# EAGLE board BLE v0.1a prater mod (EAGLE 6.5.0)
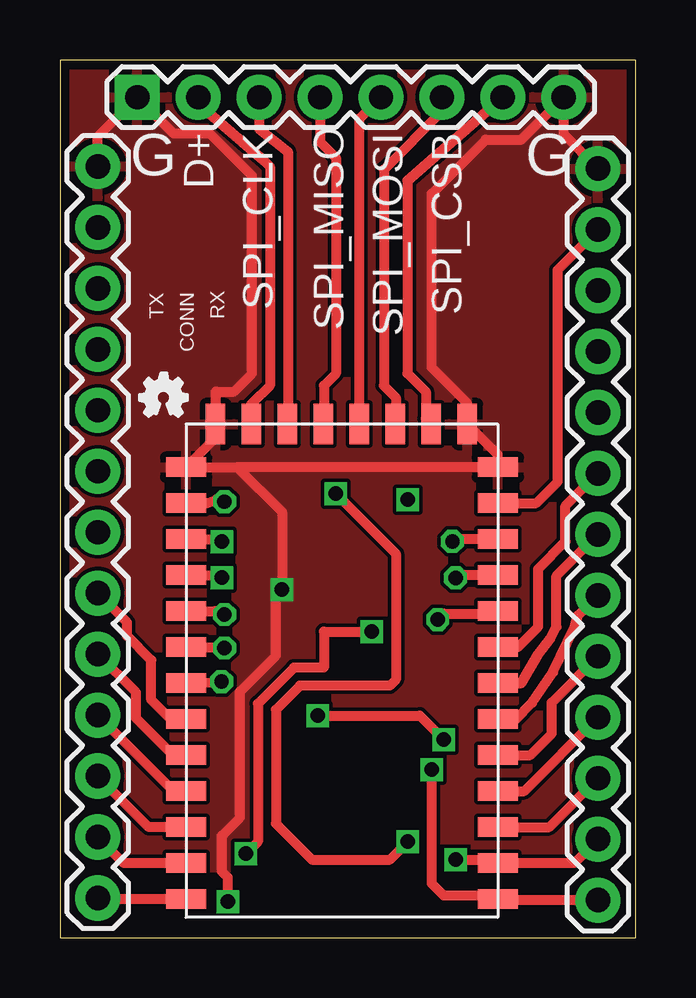
[diagram p0: board, top side]
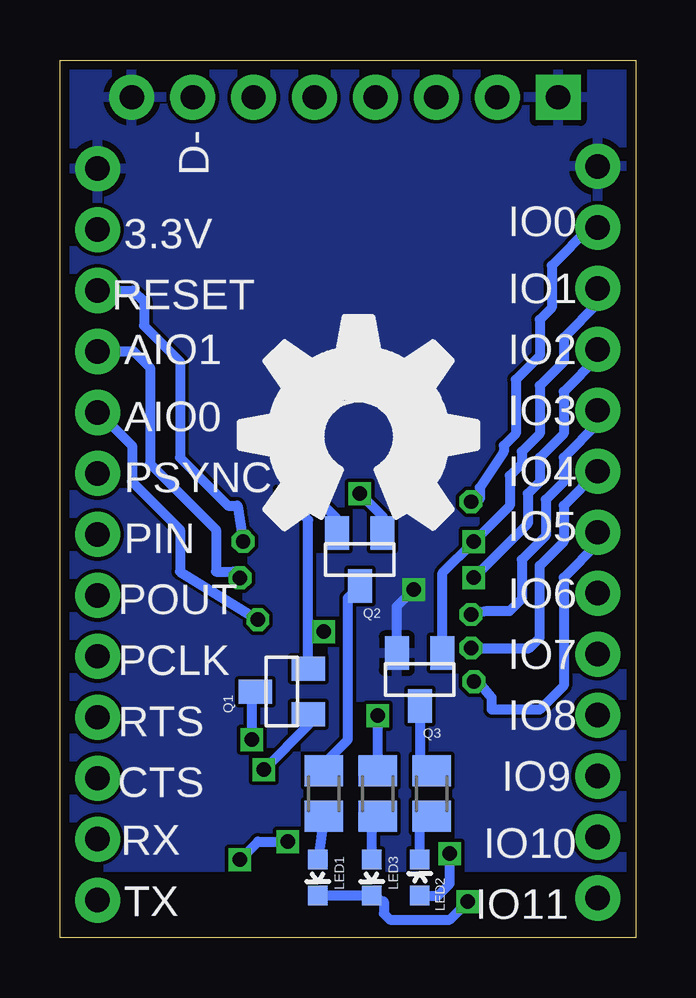
[diagram p1: board, bottom side, seen from below]

Size 24 x 36.57 mm. Coordinates in mm from the lower left corner, seen from the top.
Outline: 0,0 24,0 24,36.57 0,36.57 0,0
Copper layers (1*16): Top 0.0356mm / dielectric 1.5011mm / Bottom 0.0356mm
Design rules "LaenPCBOrder *": minimum track width 12mil, minimum drill 13mil, track to track 6mil, track to pad 6mil, pad to pad 6mil, via to via 6mil, smd to smd 6mil, copper to edge 15mil, drill to drill 6mil, minimum pad ring 7mil, minimum via ring 7mil, stop-mask expansion 4mil, vias tented up to drill 0mil, thermal gap 10mil

## Footprints (pad centres in the part's own frame; a part is rotated, then mirrored left to right if it is on the bottom)
1X13 = drill 1.016 pad 1.88: 1 0,0; 2 2.54,0; 3 5.08,0; 4 7.62,0; 5 10.16,0; 6 12.7,0; 7 15.24,0; 8 17.78,0; 9 20.32,0; 10 22.86,0; 11 25.4,0; 12 27.94,0; 13 30.48,0
1X08 = drill 1.016 pad 1.88 square: 1 0,0 | drill 1.016 pad 1.88: 2 2.54,0; 3 5.08,0; 4 7.62,0; 5 10.16,0; 6 12.7,0; 7 15.24,0; 8 17.78,0
LED-0603 = smd 0.8 x 0.8: A 0,-0.75; C 0,0.75
SOT23 = smd 1 x 1.4: 1 -0.95,-1.1; 2 0.95,-1.1; 3 0,1.1
M0805 = smd 1.3 x 1.6: 1 -0.95,0; 2 0.95,0
BLE-HM-10 = smd 1.676 x 0.813: 3.3V 0,3.29; AIO0 0,7.79; AIO1 0,6.29; GND1 0,1.79; GND4 13,1.79; PCM_CLK 0,13.79; PCM_IN 0,10.79; PCM_OUT 0,12.29; PCM_SYNC 0,9.29; PIO0 13,3.29; PIO1 13,4.79; PIO2 13,6.29; PIO3 13,7.79; PIO4 13,9.29; PIO5 13,10.79; PIO6 13,12.29; PIO7 13,13.79; PIO8 13,15.29; PIO9 13,16.79; PIO10 13,18.29; PIO11 13,19.79; RESET 0,4.79; UART_CTS 0,16.79; UART_RTS 0,15.29; UART_RX 0,18.29; UART_TX 0,19.79 | smd 0.813 x 1.676: GND2 1.27,0; GND3 11.77,0; SPI_CLK 8.77,0; SPI_CSB 4.27,0; SPI_MISO 7.27,0; SPI_MOSI 5.77,0; USB_D+ 10.27,0; USB_D- 2.77,0

## Placement (x,y rotation side)
JP1  M13  [1X13]  22.43,32.04 270 top
JP2  M13  [1X13]  1.58,1.65 90 top
JP3  [1X08]  3.22,35.02 0 top
LED1  [LED-0603]  13.25,2.5 180 bottom
LED2  [LED-0603]  9,2.5 0 bottom
LED3  [LED-0603]  11,2.5 180 bottom
Q1  MMBT3906  [SOT23]  14.75,10.25 90 bottom
Q2  MMBT3906  [SOT23]  11.5,15.75 180 bottom
Q3  MMBT2222A  [SOT23]  9,10.75 180 bottom
R7  220  [M0805]  8.5,6 270 bottom
R8  220  [M0805]  10.75,6 90 bottom
R9  220  [M0805]  13,6 90 bottom
U$1  BLE-HM-10  [BLE-HM-10]  18.26,21.4 180 top
U$2  [OSHW_FILLX350_NOTEXT]  16.51,17.02 0 bottom
U$3  [OSHW_FILLX70_NOTEXT]  3.32,21.73 0 top

## Library data of the parts
JP1-JP3 LED1-LED3 = SparkFun
Q1 Q2 = SparkFun-DiscreteSemi; PROD_ID: TRANS-08052
Q3 = SparkFun-DiscreteSemi; PROD_ID: TRANS-08049
R7-R9 = resistor
U$1 = Random parts
U$2 U$3 = ohw-logo

## Nets
3.3V: LED2.A Q1.2 Q2.2
GND: JP1.1 JP2.13 JP3.1 JP3.8 LED1.C LED3.C Q3.2 U$1.GND1 U$1.GND2 U$1.GND3 U$1.GND4
HVTX->LVRX: JP1.12 Q2.1 U$1.UART_RX
LVRX->HVTX: JP1.13 Q1.1 U$1.UART_TX
N$2: Q3.3 R7.1
N$3: JP1.3 U$1.RESET
N$4: JP1.4 U$1.AIO1
N$5: JP1.5 U$1.AIO0
N$6: JP1.6 U$1.PCM_SYNC
N$7: JP1.7 U$1.PCM_IN
N$8: JP1.8 U$1.PCM_OUT
N$9: JP1.9 U$1.PCM_CLK
N$10: JP1.10 U$1.UART_RTS
N$11: JP1.11 U$1.UART_CTS
N$14: JP2.1 U$1.PIO11
N$15: JP2.2 U$1.PIO10
N$16: JP2.3 U$1.PIO9
N$17: JP2.4 U$1.PIO8
N$18: JP2.5 U$1.PIO7
N$19: JP2.6 U$1.PIO6
N$20: JP2.7 U$1.PIO5
N$21: JP2.8 U$1.PIO4
N$22: JP2.9 U$1.PIO3
N$23: JP2.10 U$1.PIO2
N$25: JP2.11 Q3.1 U$1.PIO1
N$26: LED2.C R7.2
N$28: JP3.2 U$1.USB_D+
N$29: JP3.3 U$1.SPI_CLK
N$30: JP3.4 U$1.SPI_MISO
N$31: JP3.5 U$1.SPI_MOSI
N$32: JP3.6 U$1.SPI_CSB
N$33: JP3.7 U$1.USB_D-
N$34: Q2.3 R9.2
N$35: LED1.A R9.1
N$39: LED3.A R8.1
N$40: Q1.3 R8.2
N$41: JP1.2 U$1.3.3V
N$42: JP2.12 U$1.PIO0

## Tracks (layer width: path | path; a pad name or v marks a point on that pad's centre or on a via)
3.3V  (via drill 0.6)
  Top 0.406: 14.64,18.11 v14.5,18.25 | v13,12.75 11,12.75 11,11.25 9.75,11.25 8.25,9.75 8.25,4 v7.75,3.5
  Bottom 0.406: Q2.2 12.45,17.45 13.25,18.25 v14.5,18.25 13.65,17.4 13.65,12.75 | Q1.2 13.65,12.75 | v13,12.75 13.65,12.75 | LED2.A 8.25,1.75 7.75,2.25 v7.75,3.5
GND  (via drill 0.6)
  Top 0.406: JP2.13 1.58,33.37 JP3.1 4.74,33.5 6.25,33.5 8,31.75 8,23.5 7.25,22.75 6.5,22.75 U$1.GND3 6.49,20.84 U$1.GND4 7.39,19.61 | JP1.1 21,33.47 JP3.8 19.24,33.25 17.75,33.25 15.5,31 15.5,23.75 16.99,22.26 U$1.GND2 18.26,20.13 U$1.GND1 7.39,19.61 | 7.39,19.61 9.25,17.75 v9.25,14.5 9,14.25 9,11.75 7.5,10.25 7.5,5 6.75,4.25 6.75,2.75 7,2.5 v7,1.5
  Bottom 0.406: LED1.C LED3.C 10.5,1.5 10.5,1 10.25,0.75 7.75,0.75 v7,1.5 | Q3.2 9.95,13.8 v9.25,14.5
  pour Bottom: -0.51,2.92 24.64,2.92 24.64,37.34 -0.51,37.34
  pour Top: 0.5,36 0.5,2.93 24,2.93 24,36.5 0.5,36.5
HVTX->LVRX  (via drill 0.6)
  Top 0.406: JP1.12 21.44,3.11 U$1.UART_RX 18.12,3.25 v16.5,3.25 | v11.5,18.5 14,16 14,10.75 13.75,10.5 10,10.5 9,9.5 9,4.75 10.5,3.25 13.75,3.25 v14.5,4
  Bottom 0.406: Q2.1 10.55,17.55 v11.5,18.5 | v16.5,3.25 15.75,4 v14.5,4
LVRX->HVTX  (via drill 0.6)
  Top 0.406: JP1.13 18.26,1.56 U$1.UART_TX 18.12,1.75 16,1.75 15.5,2.25 v15.5,7
  Bottom 0.406: Q1.1 13.65,8.85 v15.5,7
N$2
  Bottom 0.406: Q3.3 9,7.45 R7.1
N$3  (via drill 0.6)
  Top 0.406: U$1.RESET 16.46,16.61 v16.36,16.51
  Bottom 0.406: JP1.3 20.96,26.96 20.5,26.5 20.5,25.5 19,24 19,20 17,18 16.6,18 v16.36,16.51
N$4  (via drill 0.6)
  Top 0.406: U$1.AIO1 16.62,15.11 v16.5,14.99
  Bottom 0.406: JP1.4 20.92,24.42 20.25,23.75 20.25,19.75 17.5,17 17.5,15.25 16.76,15.25 v16.5,14.99
N$5  (via drill 0.6)
  Top 0.406: v15.75,13.25 16,13.5 18.15,13.5 U$1.AIO0
  Bottom 0.406: JP1.5 22.38,21.88 21,20.5 21,19 19,17 19,15.25 v15.75,13.25
N$6
  Top 0.406: U$1.PCM_SYNC 19.09,12.11 19.94,12.95 19.94,15.37 21.08,16.51 21.08,17.99 JP1.6
N$7
  Top 0.406: U$1.PCM_IN 19.24,10.61 19.95,11.81 20.45,12.45 20.7,12.95 20.7,15.07 JP1.7
N$8
  Top 0.406: U$1.PCM_OUT 19.01,9.11 19.68,9.78 20.56,11.05 21.46,12.95 21.59,13.42 JP1.8
N$9
  Top 0.406: U$1.PCM_CLK 19.61,7.61 20.5,8.5 20.5,9.79 JP1.9
N$10
  Top 0.406: U$1.UART_RTS 19.36,6.11 JP1.10
N$11
  Top 0.406: U$1.UART_CTS 20.4,4.61 JP1.11
N$14
  Top 0.406: U$1.PIO11 1.62,1.61 JP2.1
N$15
  Top 0.406: U$1.PIO10 2.66,3.11 JP2.2
N$16
  Top 0.406: U$1.PIO9 3.7,4.61 JP2.3
N$17
  Top 0.406: U$1.PIO8 4.74,6.11 JP2.4
N$18
  Top 0.406: U$1.PIO7 4.71,7.61 3.17,9.14 3.17,10.21 JP2.5
N$19
  Top 0.406: U$1.PIO6 4.61,9.11 3.81,9.91 3.81,11.56 2.79,12.57 2.79,13.13 JP2.6
N$20  (via drill 0.6)
  Top 0.406: U$1.PIO5 5.68,10.61 v6.74,10.67
  Bottom 0.406: JP2.7 1.58,16.42 3,15 3,10.5 4,9.5 6,9.5 6,10 6.41,10.5 v6.74,10.67
N$21  (via drill 0.6)
  Top 0.305: 6,12 U$1.PIO4
  Top 0.406: U$1.PIO4 6.82,12.11 v6.86,12.06
  Bottom 0.406: v6.86,12.06 4.43,12.06 4,12.5 4,15.5 3,16.5 3,18 JP2.8
N$22  (via drill 0.6)
  Top 0.406: U$1.PIO3 6.47,13.61 v6.86,13.46
  Bottom 0.406: JP2.9 1.58,21.42 3,20 3,19 3.75,18.25 3.75,16.75 4.75,15.75 4.75,14.12 U$1.PIO3 6.22,13.61 v6.86,13.46
N$23  (via drill 0.6)
  Top 0.406: U$1.PIO2 6.64,15.11 v6.75,15
  Bottom 0.406: JP2.10 1.58,24.17 3,22.75 3,21 4,20 4,19 4.5,18.5 4.5,17.25 v6.75,15
N$25  (via drill 0.6)
  Top 0.406: U$1.PIO1 6.64,16.61 v6.75,16.5
  Bottom 0.406: JP2.11 1.58,26.42 3,25 3,24 4,23 4,21 4.75,20.25 4.75,19.75 5.25,19.25 5.25,18 v6.75,16.5 8.05,15.2 Q3.1
N$26
  Bottom 0.406: R7.2 9,5.05 LED2.C
N$28
  Top 0.406: JP3.2 5.76,34.73 8.5,32.37 8.75,32.12 8.75,23 7.99,22.24 U$1.USB_D+
N$29
  Top 0.406: JP3.3 8.3,33.7 9.5,32.75 U$1.SPI_CLK
N$30
  Top 0.406: JP3.4 10.85,33.16 11.5,32.5 11.5,23.5 11,23 U$1.SPI_MISO
N$31
  Top 0.406: U$1.SPI_MOSI 12.49,34.12 JP3.5
N$32
  Top 0.406: JP3.6 15.93,34.42 13.5,32 13.5,23 14,22.5 U$1.SPI_CSB
N$33
  Top 0.406: JP3.7 14.49,31.54 14.49,23.51 15.25,22.75 15.25,21.64 U$1.USB_D-
N$34
  Bottom 0.406: R9.2 13,7.25 12,8.25 12,14.15 Q2.3
N$35
  Bottom 0.406: R9.1 LED1.A
N$39
  Bottom 0.406: LED3.A 11,4.8 R8.1
N$40  (via drill 0.6)
  Top 0.406: v10.75,9.25 15,9.25 v16,8.25
  Bottom 0.406: R8.2 v10.75,9.25 | v16,8.25 16,10.1 Q1.3
N$41
  Top 0.406: U$1.3.3V 19.86,18.11 20.75,19 20.75,27.82 JP1.2
N$42  (via drill 0.6)
  Top 0.406: U$1.PIO0 6.14,18.11 6.5,18.25 6.7,18.25 v6.86,18.16
  Bottom 0.406: JP2.12 1.91,29.59 3.5,28 3.5,26.25 4,25.75 4,24.25 5,23.25 5,21 5.5,20.5 5.5,20.25 6.5,18.75 6.5,18.27 v6.86,18.16

## Text on the board
tNames: D+ | SPI_CLK | SPI_MISO | SPI_MOSI | SPI_CSB | G | G | TX | RX | CONN
bNames: D- | IO0 | 3.3V | IO1 | RESET | IO2 | AIO1 | IO3 | AIO0 | IO4 | PSYNC | IO5 | PIN | IO6 | POUT | IO7 | PCLK | IO8 | RTS | IO9 | CTS | IO10 | RX | IO11 | TX